# Allegro board FUENTE BOOST.brd

Outline 150 x 100 mm; copper layers: TOP, SEPARACION, BOTTOM. Coordinates in mm from the lower left corner of the outline.
Outline path: rectangle 0,0 150,100

## Design rules (mm)
constraint set DEFAULT: min track width 0.127

## Placement (name value [footprint] x y rotation side)
C1  1n  [CAPPC7343X430N]  53 61 0 top
C2  1n  [CAPPC7343X430N]  41 61 90 top
C3  10u  [CAPC2012X135N]  15 27 0 top
C4  100n  [CAPC1005X55N]  15 24 0 top
C5  10u  [CAPC2012X135N]  15 22 0 top
D1  DIODE  [SODFL3516X90N]  41 69 180 top
D3  DIODE  [SODFL3516X90N]  15 19 0 top
IC*  -  [unnamed]  34 18 0 top
J2  HEADER 2  [386608802]  59 78 180 top
J3  HEADER 2  [386608802]  143 82 270 top
J5  HEADER 3  [JUMPER3]  8 11 90 top
J6  HEADER 2  [JUMPER2]  11 27 180 top
J7  HEADER 2  [386608802]  22 73 270 top
M1  IRFZ44  [D2PAK_TO-263AB_]  30 49 180 top
M2  IRFZ44  [D2PAK_TO-263AB_]  51 49 180 top
NOREF  -  [unnamed#2]  146 96 0 top
NOREF#2  -  [unnamed#2]  146 4 0 top
NOREF#3  -  [unnamed#2]  4 4 0 top
NOREF#4  -  [unnamed#2]  4 96 0 top
R1  110  [RESC3216X60N]  63 40 0 top
R2  110  [RESC3216X60N]  42 40 0 top

## Library data of the parts
C1-C5 = C
D1 D3 = DIODE
J2 J3 J7 = HEADER 2
J5 = HEADER 3: User Part Number: ***
J6 = HEADER 2: User Part Number: ***
M1 M2 = IRFZ44
R1 R2 = R

## Footprints (pads in the part's own frame, mm; a bottom-side part is the same pattern mirrored in y, then rotated)
386608802
  round 5.94 hole 3.96: 1(0,0) 2(12.7,-13.03)
CAPC1005X55N
  rect 0.42x0.62 smd: 1(-0.55,0) 2(0.55,0)
CAPC2012X135N
  rect 0.96x1.39 smd: 1(-0.79,0) 2(0.79,0)
CAPPC7343X430N
  rect 2.05x4.6 smd: 1(-3.1,0) 2(3.1,0)
D2PAK_TO-263AB_
  rect 3.8x1.05 smd: 1(-13.043,2.54) 2(-13.043,-2.54)
  rect 7.9x10.75 smd: 3(-2.293,0)
JUMPER2
  round 1.524 hole 0.914: 1(0,0) 2(2.54,0)
JUMPER3
  round 1.524 hole 0.914: 1(0,0) 2(2.54,0) 3(5.08,0)
RESC3216X60N
  rect 1.05x1.8 smd: 1(-1.5,0) 2(1.5,0)
SODFL3516X90N
  rect 1.21x1.04 smd: 1(-1.425,0) 2(1.425,0)
unnamed
  rect 1.925x0.65 smd: 1(-4.712,4.445) 2(-4.712,3.175) 3(-4.712,1.905) 4(-4.712,0.635) 5(-4.712,-0.635) 6(-4.712,-1.905) 7(-4.712,-3.175) 8(-4.712,-4.445) 9(4.712,-4.445) 10(4.712,-3.175) 11(4.712,-1.905) 12(4.712,-0.635) 13(4.712,0.635) 14(4.712,1.905) 15(4.712,3.175) 16(4.712,4.445)
unnamed#2
  round 4.064 hole 3.81: (0,0)

## Nets
0: C1.1 C2.1 C3.2 C5.2 J3.1 J5.3 J6.2 J7.2 M1.3(S)
N17799: D1.2 J7.1
N17807: C2.2 D1.1(K) J2.2
N17819: J2.1 M1.2 M2.2
N17849: C1.2 C4.2 J3.2 M2.3(S)
N17919: M2.1 R1.2
N17959: M1.1 R2.2
N18039: R2.1
N18043: R1.1
N18071: C3.1 C5.1 D3.2 J6.1
N18141: J5.1
N18171: J5.2
N18223: C4.1 D3.1(K)

Pads without a net: IC* 1 2 3 4 5 6 7 8 9 10 11 12 13 14 15 16
